# EAGLE board Reference (EAGLE 9.6.2)

Size 53.32 x 54.28 mm. Coordinates in mm from the lower left corner, seen from the top.
Outline: 0,0 53.32,0 53.32,54.28 0,54.28 0,0
Copper layers (1*16): Top 0.035mm / dielectric 1.5mm / Bottom 0.035mm
Design rules "default *": minimum track width 6mil, minimum drill 0.3mm, track to track 6mil, track to pad 6mil, pad to pad 6mil, via to via 6mil, smd to smd 6mil, copper to edge 10mil, drill to drill 6mil, minimum pad ring 10mil, minimum via ring 8mil, stop-mask expansion 4mil, vias tented up to drill 1mm, thermal gap 0mil

## Footprints (pad centres in the part's own frame; a part is rotated, then mirrored left to right if it is on the bottom)
C0603 = smd 1.1 x 1: 1 -0.85,0; 2 0.85,0
R0603 = smd 1 x 1.1: 1 -0.85,0; 2 0.85,0
PFB_S-PQFP-G48 = smd 1.4 x 0.3: 1 -4.3,2.75; 2 -4.3,2.25; 3 -4.3,1.75; 4 -4.3,1.25; 5 -4.3,0.75; 6 -4.3,0.25; 7 -4.3,-0.25; 8 -4.3,-0.75; 9 -4.3,-1.25; 10 -4.3,-1.75; 11 -4.3,-2.25; 12 -4.3,-2.75; 25 4.3,-2.75; 26 4.3,-2.25; 27 4.3,-1.75; 28 4.3,-1.25; 29 4.3,-0.75; 30 4.3,-0.25; 31 4.3,0.25; 32 4.3,0.75; 33 4.3,1.25; 34 4.3,1.75; 35 4.3,2.25; 36 4.3,2.75 | smd 0.3 x 1.4: 13 -2.75,-4.3; 14 -2.25,-4.3; 15 -1.75,-4.3; 16 -1.25,-4.3; 17 -0.75,-4.3; 18 -0.25,-4.3; 19 0.25,-4.3; 20 0.75,-4.3; 21 1.25,-4.3; 22 1.75,-4.3; 23 2.25,-4.3; 24 2.75,-4.3; 37 2.75,4.3; 38 2.25,4.3; 39 1.75,4.3; 40 1.25,4.3; 41 0.75,4.3; 42 0.25,4.3; 43 -0.25,4.3; 44 -0.75,4.3; 45 -1.25,4.3; 46 -1.75,4.3; 47 -2.25,4.3; 48 -2.75,4.3 | smd 5 x 5: P$1 0,0 | drill 0.305: P$2 -2,2; P$3 -1,2; P$4 0,2; P$5 1,2; P$6 2,2; P$7 -2,1; P$8 -1,1; P$9 0,1; P$10 1,1; P$11 2,1; P$12 2,0; P$13 1,0; P$14 0,0; P$15 -1,0; P$16 -2,0; P$17 -2,-1; P$18 -1,-1; P$19 0,-1; P$20 1,-1; P$21 2,-1; P$22 2,-2; P$23 1,-2; P$24 0,-2; P$25 -1,-2; P$26 -2,-2 | smd 5.08 x 5.08 bottom: P$27 0,0

## Placement (x,y rotation side)
C2  1uF  [C0603]  26.35,19.05 90 top
C3  1uF  [C0603]  35.88,42.55 0 top
C4  2.2uF  [C0603]  25.4,38.73 270 top
C5  4.7uF  [C0603]  33.34,39.05 0 top
C6  47nF  [C0603]  20.64,41.27 90 top
C7  47nF  [C0603]  13.33,38.73 90 top
C8  1uF  [C0603]  21.91,30.16 180 top
C9  1uF  [C0603]  13.02,25.4 180 top
R1  10k  [R0603]  17.78,19.05 90 top
R2  100  [R0603]  10.48,32.38 180 top
U$1  DRV8305  [PFB_S-PQFP-G48]  34.29,31.75 0 top

## Library data of the parts
C2-C9 = rcl; SPICEPREFIX: C
R1 R2 = rcl; SPICEPREFIX: R
U$1 = BLDC project

## Nets
+5V: C9.1 R1.1 U$1.48
A0: U$1.16
A1: U$1.17
A2: U$1.18
D2: U$1.1
D3: U$1.2
D4: U$1.8
D5: U$1.4
D6: U$1.6
D7: R1.2 U$1.13
D10: U$1.9
D11: U$1.10
D12: U$1.11
D13: U$1.12
GH_A: U$1.36
GH_B: U$1.29
GH_C: U$1.28
GL_A: U$1.33
GL_B: U$1.32
GL_C: U$1.25
GND: C2.2 C3.2 C5.2 C8.2 C9.2 U$1.14 U$1.20 U$1.22 U$1.24 U$1.45 U$1.P$1 U$1.P$2 U$1.P$3 U$1.P$4 U$1.P$5 U$1.P$6 U$1.P$7 U$1.P$8 U$1.P$9 U$1.P$10 U$1.P$11 U$1.P$12 U$1.P$13 U$1.P$14 U$1.P$15 U$1.P$16 U$1.P$17 U$1.P$18 U$1.P$19 U$1.P$20 U$1.P$21 U$1.P$22 U$1.P$23 U$1.P$24 U$1.P$25 U$1.P$26 U$1.P$27
N$1: C2.1 U$1.15
N$2: C3.1 U$1.37
N$3: C4.2 U$1.38
N$4: C6.2 U$1.40
N$5: C6.1 U$1.39
N$6: C7.2 U$1.43
N$7: C7.1 U$1.42
N$8: R2.1 U$1.44
N$9: C8.1 U$1.46
N$10: U$1.3
N$11: U$1.5
N$12: U$1.7
SH_A: U$1.35
SH_B: U$1.30
SH_C: U$1.27
SL_A: U$1.23 U$1.34
SL_B: U$1.21 U$1.31
SL_C: U$1.19 U$1.26
VCC: C4.1 C5.1 R2.2 U$1.41

## Tracks (layer width: path | path; a pad name or v marks a point on that pad's centre or on a via)
+5V  (2 unrouted)
D7  (1 unrouted)
GND  (34 unrouted)
N$1  (1 unrouted)
N$2  (1 unrouted)
N$3  (1 unrouted)
N$4  (1 unrouted)
N$5  (1 unrouted)
N$6  (1 unrouted)
N$7  (1 unrouted)
N$8  (1 unrouted)
N$9  (1 unrouted)
SL_A  (1 unrouted)
SL_B  (1 unrouted)
SL_C  (1 unrouted)
VCC  (3 unrouted)